# EAGLE board Daughter Card v6-shorter (EAGLE 7.7.0)
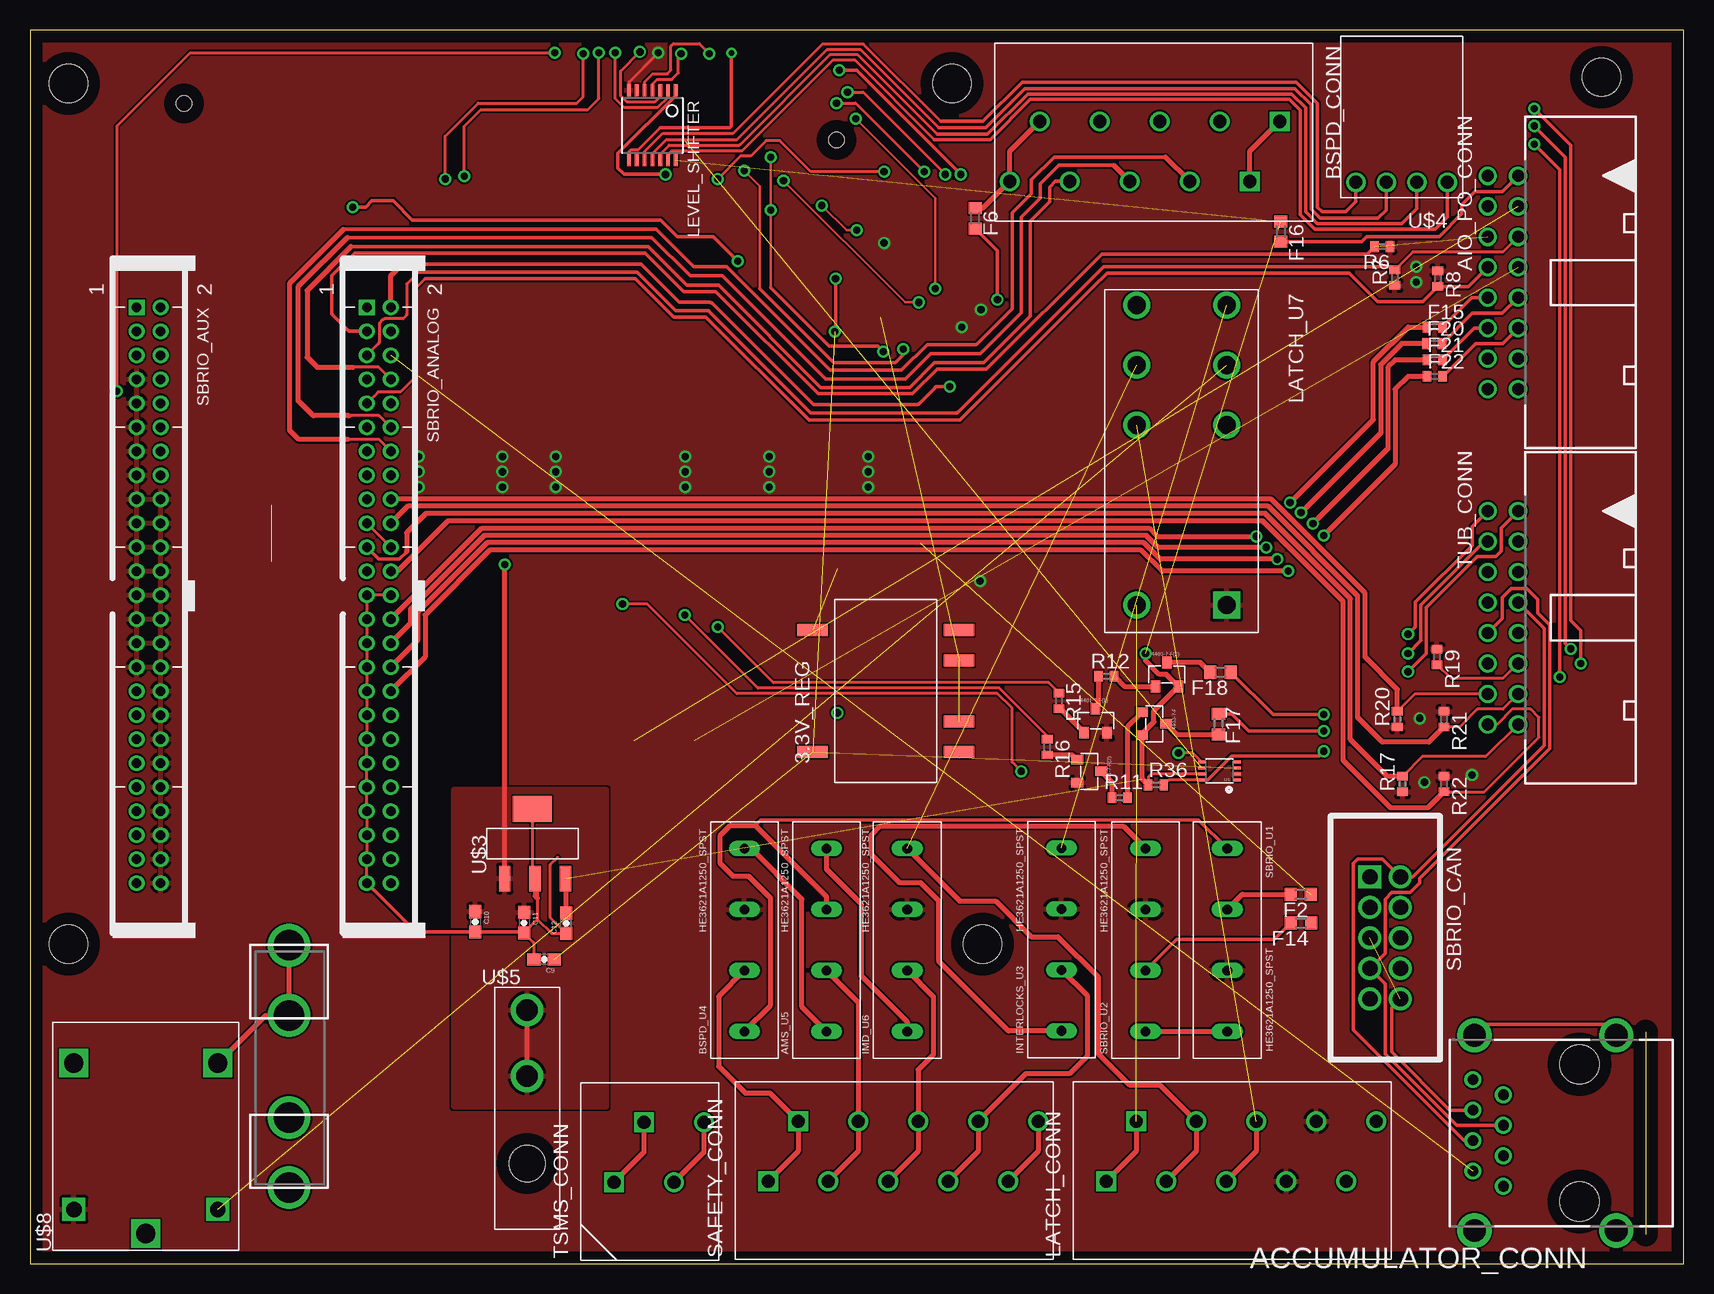
[diagram p0: board, top side]
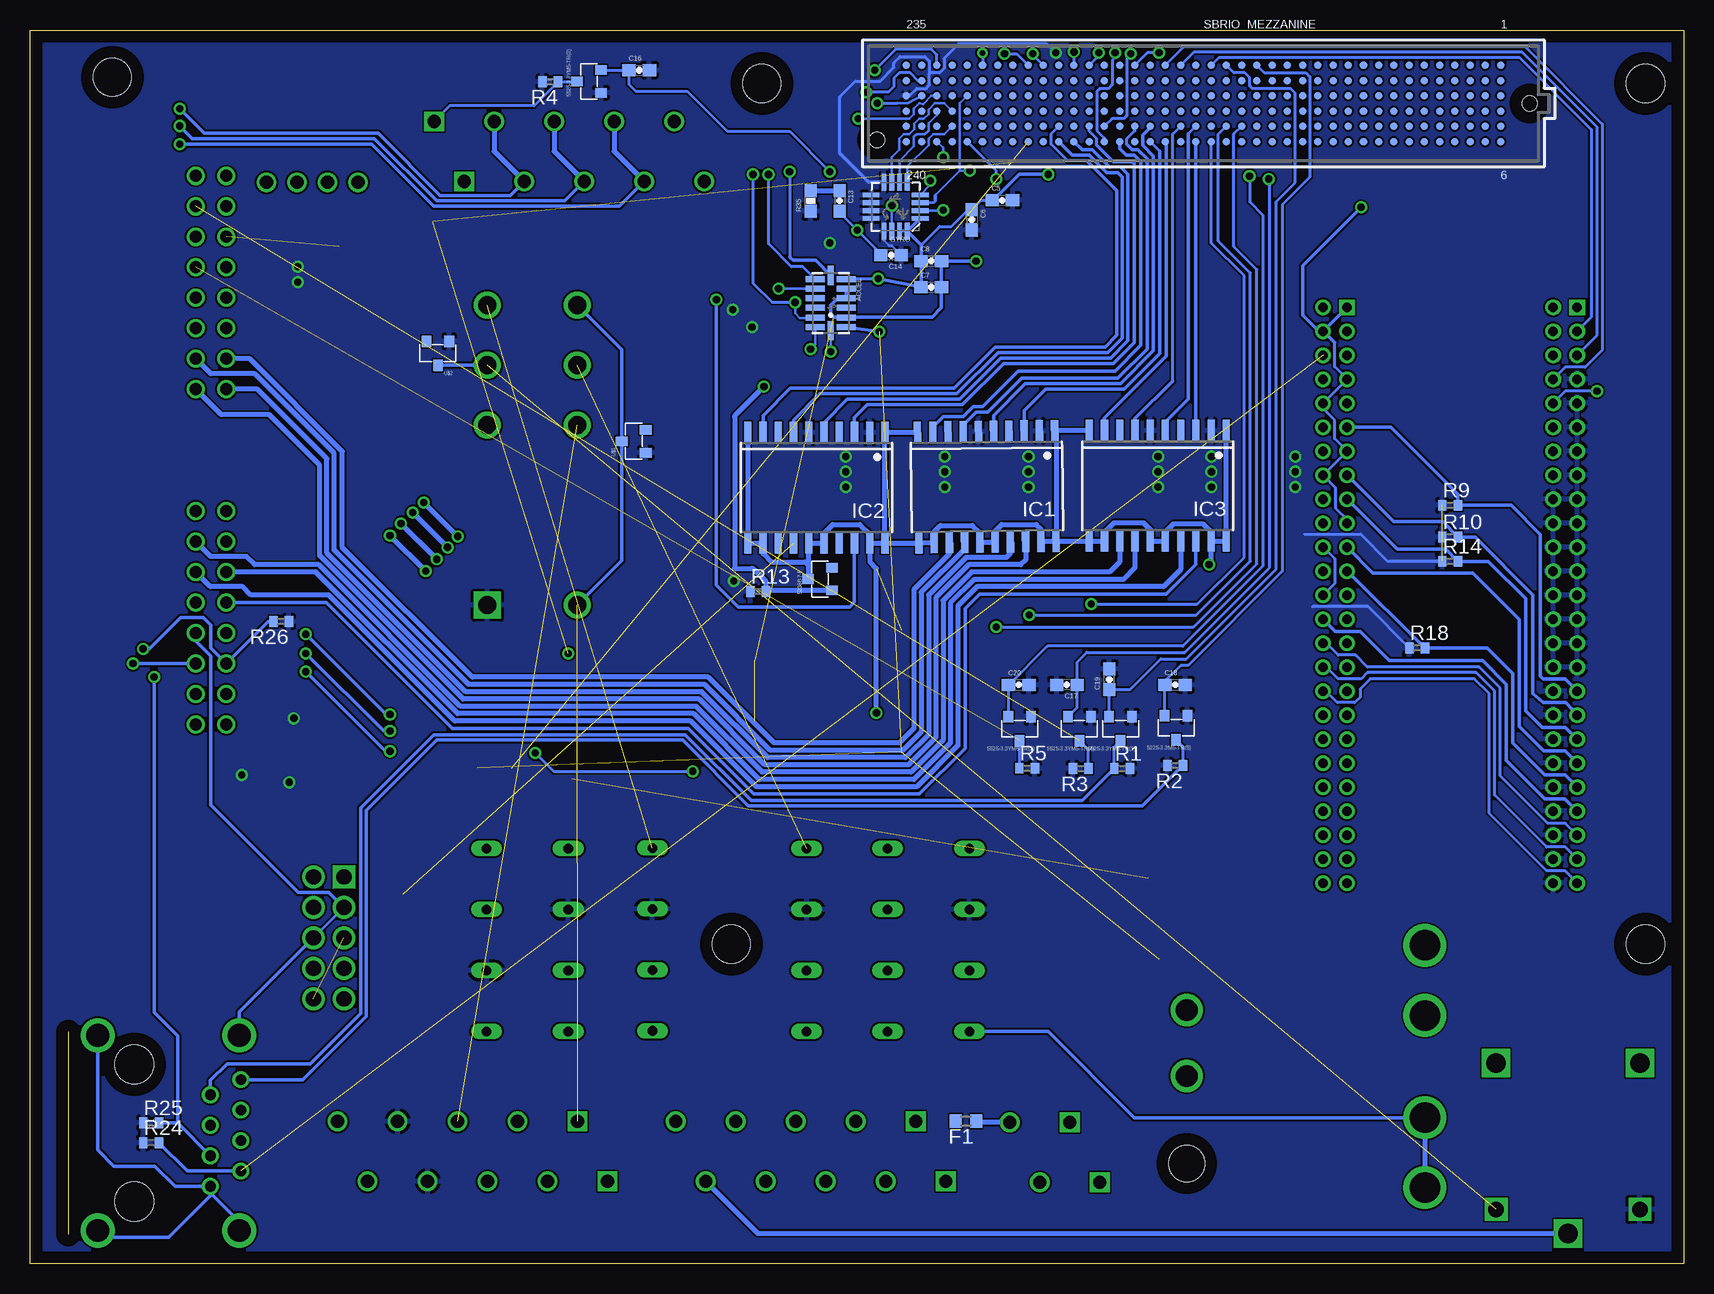
[diagram p1: board, bottom side, seen from below]

Size 137.82 x 102.87 mm. Coordinates in mm from the lower left corner, seen from the top.
Outline: 0,0 137.82,0 137.82,102.87 0,102.87 0,0
Copper layers (1*16): Top 0.035mm / dielectric 1.5mm / Bottom 0.035mm
Design rules "default *": minimum track width 8mil, minimum drill 13mil, track to track 6mil, track to pad 6mil, pad to pad 6mil, via to via 6mil, smd to smd 6mil, copper to edge 40mil, drill to drill 8mil, minimum pad ring 10mil, minimum via ring 8mil, stop-mask expansion 4mil, vias tented up to drill 0mil, thermal gap 10mil
Holes 3.17 mm at 3.2,98.4 76.83,98.4 130.96,98.93 79.38,26.67 3.2,26.67

## Footprints (pad centres in the part's own frame; a part is rotated, then mirrored left to right if it is on the bottom)
V78XX-1000 = smd 1 x 2.54: 1 -5.08,-6.096; 5 5.08,-6.096; 6 5.08,6.096; 7 2.54,6.096; 9 -2.54,6.096; 10 -5.08,6.096
SOT-23-3 = smd 0.8 x 0.976: P$1 0,1; P$2 -0.95,-1; P$3 0.95,-1
LGA14 = smd 0.5 x 1.6: 1 2,1.3; 2 1.2,1.3; 3 0.4,1.3; 4 -0.4,1.3; 5 -1.2,1.3; 6 -2,1.3; 8 -2,-1.3; 9 -1.2,-1.3; 10 -0.4,-1.3; 11 0.4,-1.3; 12 1.2,-1.3; 13 2,-1.3 | smd 1.6 x 0.5: 7 -2.3,0; 14 2.3,0
RJ45-SHIELD1 = drill 0.9 pad 1.4: 1 -4.445,6.35; 2 -3.175,8.89; 3 -1.905,6.35; 4 -0.635,8.89; 5 0.635,6.35; 6 1.905,8.89; 7 3.175,6.35; 8 4.445,8.89 | drill 1.9 pad 2.5: S1 -8.128,-3.048; S2 8.128,-3.048; S3 -8.128,8.76; S4 8.128,8.76 | hole 3.251: -5.715,0; 5.715,0
PAK100/2500-5-16 = drill 1 pad 1.422: 1 -8.89,-1.27; 2 -8.89,1.27; 3 -6.35,-1.27; 4 -6.35,1.27; 5 -3.81,-1.27; 6 -3.81,1.27; 7 -1.27,-1.27; 8 -1.27,1.27; 9 1.27,-1.27; 10 1.27,1.27; 11 3.81,-1.27; 12 3.81,1.27; 13 6.35,-1.27; 14 6.35,1.27; 15 8.89,-1.27; 16 8.89,1.27
HE3621A1250_SPST = drill 0.8 long: C+ -2.54,0; C- 2.54,0; S1 -7.62,0; S2 7.62,0
CONNECTOR_5 = drill 1.1 square: 1 0,0; 2 2.5,5 | drill 1.1: 3 5,0; 4 7.5,5; 5 10,0; 6 12.5,5; 7 15,0; 8 17.5,5; 9 20,0; 10 22.5,5
0603-CAP = smd 1.1 x 1: 1 -0.85,0; 2 0.85,0
R0603 = smd 1 x 1.1: 1 -0.85,0; 2 0.85,0
FUSE_5MM = drill 2.54 pad 3.556: 1 0,-10.1; 2 0,-4.258; 3 0,4.258; 4 0,10.1
R0402 = smd 0.7 x 0.9: 1 -0.65,0; 2 0.65,0
LGA16-4X4 = smd 1.4 x 0.4: 1 -2.05,0.975; 2 -2.05,0.325; 3 -2.05,-0.325; 4 -2.05,-0.975; 9 2.05,-0.975; 10 2.05,-0.325; 11 2.05,0.325; 12 2.05,0.975 | smd 0.4 x 1.4: 5 -0.975,-2.05; 6 -0.325,-2.05; 7 0.325,-2.05; 8 0.975,-2.05; 13 0.975,2.05; 14 0.325,2.05; 15 -0.325,2.05; 16 -0.975,2.05
PG-DSO-20 = smd 0.6 x 1.8: 1 -5.715,-4.6; 2 -4.445,-4.6; 3 -3.175,-4.6; 4 -1.905,-4.6; 5 -0.635,-4.6; 6 0.635,-4.6; 7 1.905,-4.6; 8 3.175,-4.6; 9 4.445,-4.6; 10 5.715,-4.6; 11 5.715,4.6; 12 4.445,4.6; 13 3.175,4.6; 14 1.905,4.6; 15 0.635,4.6; 16 -0.635,4.6; 17 -1.905,4.6; 18 -3.175,4.6; 19 -4.445,4.6; 20 -5.715,4.6
DPDT_JW2_FORM_C = drill 1.5: CENTER_1 -8,3.75; CENTER_2 -8,-3.75; COIL_2 12,-3.75; NC_1 -3,3.75; NC_2 -3,-3.75; NO_1 -13,3.75; NO_2 -13,-3.75 | drill 1.5 square: COIL_1 12,3.75
TSSOP14 = smd 0.305 x 0.991: 1 -1.95,-2.918; 2 -1.3,-2.918; 3 -0.65,-2.918; 4 0,-2.918; 5 0.65,-2.918; 6 1.3,-2.918; 7 1.95,-2.918; 8 1.95,2.918; 9 1.3,2.918; 10 0.65,2.918; 11 0,2.918; 12 -0.65,2.918; 13 -1.3,2.918; 14 -1.95,2.918
0603-RES = smd 1.1 x 1: 1 -0.85,0; 2 0.85,0
SBRIO_J502_J503 = drill 0.8 square: P$1 0,0 | drill 0.8: P$2 0,2; P$3 2,0; P$4 2,2; P$5 4,0; P$6 4,2; P$7 6,0; P$8 6,2; P$9 8,0; P$10 8,2; P$11 10,0; P$12 10,2; P$13 12,0; P$14 12,2; P$15 14,0; P$16 14,2; P$17 16,0; P$18 16,2; P$19 18,0; P$20 18,2; P$21 20,0; P$22 20,2; P$23 22,0; P$24 22,2; P$25 24,0; P$26 24,2; P$27 26,0; P$28 26,2; P$29 28,0; P$30 28,2; P$31 30,0; P$32 30,2; P$33 32,0; P$34 32,2; P$35 34,0; P$36 34,2; P$37 36,0; P$38 36,2; P$39 38,0; P$40 38,2; P$41 40,0; P$42 40,2; P$43 42,0; P$44 42,2; P$45 44,0; P$46 44,2; P$47 46,0; P$48 46,2; P$49 48,0; P$50 48,2
SBRIO_W = drill 1.27 pad 1.778 square: P$1 -5.08,-1.27 | drill 1.27 pad 1.778: P$2 -5.08,1.27; P$3 -2.54,-1.27; P$4 -2.54,1.27; P$5 0,-1.27; P$6 0,1.27; P$7 2.54,-1.27; P$8 2.54,1.27; P$9 5.08,-1.27; P$10 5.08,1.27
SEAM-40-XX.X-XX-06-X-A = smd 0.635 x 0.635: 1 24.765,3.175; 2 24.765,1.905; 3 24.765,0.635; 4 24.765,-0.635; 5 24.765,-1.905; 6 24.765,-3.175; 7 23.495,3.175; 8 23.495,1.905; 9 23.495,0.635; 10 23.495,-0.635; 11 23.495,-1.905; 12 23.495,-3.175; 13 22.225,3.175; 14 22.225,1.905; 15 22.225,0.635; 16 22.225,-0.635; 17 22.225,-1.905; 18 22.225,-3.175; 19 20.955,3.175; 20 20.955,1.905; 21 20.955,0.635; 22 20.955,-0.635; 23 20.955,-1.905; 24 20.955,-3.175; 25 19.685,3.175; 26 19.685,1.905; 27 19.685,0.635; 28 19.685,-0.635; 29 19.685,-1.905; 30 19.685,-3.175; 31 18.415,3.175; 32 18.415,1.905; 33 18.415,0.635; 34 18.415,-0.635; 35 18.415,-1.905; 36 18.415,-3.175; 37 17.145,3.175; 38 17.145,1.905; 39 17.145,0.635; 40 17.145,-0.635; 41 17.145,-1.905; 42 17.145,-3.175; 43 15.875,3.175; 44 15.875,1.905; 45 15.875,0.635; 46 15.875,-0.635; 47 15.875,-1.905; 48 15.875,-3.175; 49 14.605,3.175; 50 14.605,1.905; 51 14.605,0.635; 52 14.605,-0.635; 53 14.605,-1.905; 54 14.605,-3.175; 55 13.335,3.175; 56 13.335,1.905; 57 13.335,0.635; 58 13.335,-0.635; 59 13.335,-1.905; 60 13.335,-3.175; 61 12.065,3.175; 62 12.065,1.905; 63 12.065,0.635; 64 12.065,-0.635; 65 12.065,-1.905; 66 12.065,-3.175; 67 10.795,3.175; 68 10.795,1.905; 69 10.795,0.635; 70 10.795,-0.635; 71 10.795,-1.905; 72 10.795,-3.175; 73 9.525,3.175; 74 9.525,1.905; 75 9.525,0.635; 76 9.525,-0.635; 77 9.525,-1.905; 78 9.525,-3.175; 79 8.255,3.175; 80 8.255,1.905; 81 8.255,0.635; 82 8.255,-0.635; 83 8.255,-1.905; 84 8.255,-3.175; 85 6.985,3.175; 86 6.985,1.905; 87 6.985,0.635; 88 6.985,-0.635; 89 6.985,-1.905; 90 6.985,-3.175; 91 5.715,3.175; 92 5.715,1.905; 93 5.715,0.635; 94 5.715,-0.635; 95 5.715,-1.905; 96 5.715,-3.175; 97 4.445,3.175; 98 4.445,1.905; 99 4.445,0.635; 100 4.445,-0.635; 101 4.445,-1.905; 102 4.445,-3.175; 103 3.175,3.175; 104 3.175,1.905; 105 3.175,0.635; 106 3.175,-0.635; 107 3.175,-1.905; 108 3.175,-3.175; 109 1.905,3.175; 110 1.905,1.905; 111 1.905,0.635; 112 1.905,-0.635; 113 1.905,-1.905; 114 1.905,-3.175; 115 0.635,3.175; 116 0.635,1.905; 117 0.635,0.635; 118 0.635,-0.635; 119 0.635,-1.905; 120 0.635,-3.175; 121 -0.635,3.175; 122 -0.635,1.905; 123 -0.635,0.635; 124 -0.635,-0.635; 125 -0.635,-1.905; 126 -0.635,-3.175; 127 -1.905,3.175; 128 -1.905,1.905; 129 -1.905,0.635; 130 -1.905,-0.635; 131 -1.905,-1.905; 132 -1.905,-3.175; 133 -3.175,3.175; 134 -3.175,1.905; 135 -3.175,0.635; 136 -3.175,-0.635; 137 -3.175,-1.905; 138 -3.175,-3.175; 139 -4.445,3.175; 140 -4.445,1.905; 141 -4.445,0.635; 142 -4.445,-0.635; 143 -4.445,-1.905; 144 -4.445,-3.175; 145 -5.715,3.175; 146 -5.715,1.905; 147 -5.715,0.635; 148 -5.715,-0.635; 149 -5.715,-1.905; 150 -5.715,-3.175; 151 -6.985,3.175; 152 -6.985,1.905; 153 -6.985,0.635; 154 -6.985,-0.635; 155 -6.985,-1.905; 156 -6.985,-3.175; 157 -8.255,3.175; 158 -8.255,1.905; 159 -8.255,0.635; 160 -8.255,-0.635; 161 -8.255,-1.905; 162 -8.255,-3.175; 163 -9.525,3.175; 164 -9.525,1.905; 165 -9.525,0.635; 166 -9.525,-0.635; 167 -9.525,-1.905; 168 -9.525,-3.175; 169 -10.795,3.175; 170 -10.795,1.905; 171 -10.795,0.635; 172 -10.795,-0.635; 173 -10.795,-1.905; 174 -10.795,-3.175; 175 -12.065,3.175; 176 -12.065,1.905; 177 -12.065,0.635; 178 -12.065,-0.635; 179 -12.065,-1.905; 180 -12.065,-3.175; 181 -13.335,3.175; 182 -13.335,1.905; 183 -13.335,0.635; 184 -13.335,-0.635; 185 -13.335,-1.905; 186 -13.335,-3.175; 187 -14.605,3.175; 188 -14.605,1.905; 189 -14.605,0.635; 190 -14.605,-0.635; 191 -14.605,-1.905; 192 -14.605,-3.175; 193 -15.875,3.175; 194 -15.875,1.905; 195 -15.875,0.635; 196 -15.875,-0.635; 197 -15.875,-1.905; 198 -15.875,-3.175; 199 -17.145,3.175; 200 -17.145,1.905; 201 -17.145,0.635; 202 -17.145,-0.635; 203 -17.145,-1.905; 204 -17.145,-3.175; 205 -18.415,3.175; 206 -18.415,1.905; 207 -18.415,0.635; 208 -18.415,-0.635; 209 -18.415,-1.905; 210 -18.415,-3.175; 211 -19.685,3.175; 212 -19.685,1.905; 213 -19.685,0.635; 214 -19.685,-0.635; 215 -19.685,-1.905; 216 -19.685,-3.175; 217 -20.955,3.175; 218 -20.955,1.905; 219 -20.955,0.635; 220 -20.955,-0.635; 221 -20.955,-1.905; 222 -20.955,-3.175; 223 -22.225,3.175; 224 -22.225,1.905; 225 -22.225,0.635; 226 -22.225,-0.635; 227 -22.225,-1.905; 228 -22.225,-3.175; 229 -23.495,3.175; 230 -23.495,1.905; 231 -23.495,0.635; 232 -23.495,-0.635; 233 -23.495,-1.905; 234 -23.495,-3.175; 235 -24.765,3.175; 236 -24.765,1.905; 237 -24.765,0.635; 238 -24.765,-0.635; 239 -24.765,-1.905; 240 -24.765,-3.175 | hole 1.27: 27.191,0; -27.191,-3.048
CONNECTOR_2 = drill 1.1 square: 1 0,0; 2 2.5,5 | drill 1.1: 3 5,0; 4 7.5,5
VFSOP-8 = smd 0.25 x 0.65: P$1 -0.75,-1.45; P$2 -0.25,-1.45; P$3 0.25,-1.45; P$4 0.75,-1.45; P$5 0.75,1.45; P$6 0.25,1.45; P$7 -0.25,1.45; P$8 -0.75,1.45
SOT223-4 = smd 0.95 x 2.15: 1 -2.3,-2.9; 2 0.24,-2.9; 3 2.78,-2.9 | smd 3.25 x 2.15: 4 0,2.9
MOLEX_70553-0038 = drill 1.09: 1 -3.81,0; 2 -1.27,0; 3 1.27,0; 4 3.81,0
MOLEX_39-30-1020 = drill 1.8: 1 0,0; 2 0,5.5 | hole 3: 0,-7.3
RELAY = drill 1.6 square: A 14.199,-5.994; B 14.199,5.994; CENTER 0,0 | drill 1.27 square: V1 2.007,5.994; V2 2.007,-5.994

## Placement (x,y rotation side)
3.3V_REG  V7803-1000  [V78XX-1000]  71.32,47.75 270 top
4401-7-F(1)  MMBT4401-7-F  [SOT-23-3]  88.8,45.29 0 top
4401-7-F(2)  MMBT4401-7-F  [SOT-23-3]  88.27,41.07 270 top
4403-7-F  MMBT4403-7-F  [SOT-23-3]  93.68,45.03 270 top
4403-7-F(2)  MMBT4403-7-F  [SOT-23-3]  94.74,49.15 0 top
5225-3.3M5-TR(5)  MIC5225-3.3YM5-TR  [SOT-23-3]  42.32,44.7 180 bottom
5238B-7-F  MMBZ5238B-7-F  [SOT-23-3]  71.98,57.1 90 bottom
5525-3.3YM5-TR(1)  MIC5225-3.3YM5-TR  [SOT-23-3]  46.94,44.63 180 bottom
5525-3.3YM5-TR(2)  MIC5225-3.3YM5-TR  [SOT-23-3]  55.35,44.63 180 bottom
5525-3.3YM5-TR(3)  MIC5225-3.3YM5-TR  [SOT-23-3]  91.24,98.58 90 bottom
5525-3.3YM5-TR(4)  MIC5225-3.3YM5-TR  [SOT-23-3]  50.37,44.63 180 bottom
ACCEL  ADXL345  [LGA14]  71.09,80.11 270 bottom
ACCUMULATOR_CONN  RJ45-6L21-S  [RJ45-SHIELD1]  129.13,10.92 90 top
AIO_PO_CONN  2516-5  [PAK100/2500-5-16]  122.73,81.81 270 top
AMS_U5  HE3621A1250_SPST  [HE3621A1250_SPST]  66.37,27 90 top
BSPD_CONN  CONN_5  [CONNECTOR_5]  104.14,95.25 180 top
BSPD_U4  HE3621A1250_SPST  [HE3621A1250_SPST]  59.54,27 90 top
C5  .1uF  [0603-CAP]  56.79,88.67 0 bottom
C6  10uF  [0603-CAP]  59.33,87.05 270 bottom
C7  .1uF  [0603-CAP]  62.71,81.43 0 bottom
C8  1uF  [0603-CAP]  62.71,83.62 0 bottom
C9  22uF  [0603-CAP]  42.85,25.4 180 top
C10  10uF  [0603-CAP]  37.11,28.52 270 top
C11  10uF  [0603-CAP]  41.17,28.45 270 top
C12  22uF  [0603-CAP]  44.68,28.4 90 top
C13  470nF  [0603-CAP]  70.36,88.62 270 bottom
C14  10nF  [0603-CAP]  66.07,84.1 180 bottom
C16  1uF  [0603-CAP]  87.05,99.52 0 bottom
C17  1uF  [0603-CAP]  51.41,48.29 180 bottom
C18  1uF  [0603-CAP]  42.39,48.29 0 bottom
C19  1uF  [0603-CAP]  47.88,48.74 90 bottom
C20  1uF  [0603-CAP]  55.42,48.29 0 bottom
F1  250mA  [R0603]  59.82,11.91 180 bottom
F2  250mA  [R0603]  105.89,30.81 180 top
F3  FUSEX20MM  [FUSE_5MM]  21.59,16.46 180 top
F6  250mA  [R0603]  78.77,87.17 270 top
F14  250mA  [R0603]  105.92,28.42 180 top
F15  10mA PTC  [R0402]  117.04,78.11 0 top
F16  0.5A PTC  [R0603]  104.24,86.06 270 top
F17  1A PTC  [R0603]  99.03,44.98 270 top
F18  1A PTC  [R0603]  99.21,49.33 180 top
F20  10mA PTC  [R0402]  117.02,76.73 0 top
F21  10mA PTC  [R0402]  117.04,75.36 0 top
F22  10mA PTC  [R0402]  117.07,73.99 0 top
GYRO  L3G4200D  [LGA16-4X4]  65.68,88.14 180 bottom
IC1  BTS716G  [PG-DSO-20]  58.09,64.8 180.7 bottom
IC2  BTS716G  [PG-DSO-20]  72.29,64.72 180 bottom
IC3  BTS716G  [PG-DSO-20]  43.84,64.87 180 bottom
IMD_U6  HE3621A1250_SPST  [HE3621A1250_SPST]  73.1,27 90 top
INTERLOCKS_U3  HE3621A1250_SPST  [HE3621A1250_SPST]  85.95,27.05 90 top
LATCH_CONN  CONN_5  [CONNECTOR_5]  89.69,6.88 0 top
LATCH_U7  JW2SN-DC12V  [DPDT_JW2_FORM_C]  95.96,66.93 270 top
LEVEL_SHIFTER  [TSSOP14]  51.87,94.92 180 top
R1  10k  [R0402]  46.81,41.3 0 bottom
R2  10k  [R0402]  42.39,41.55 180 bottom
R3  10k  [R0402]  50.27,41.3 180 bottom
R4  10k  [R0402]  94.46,98.55 180 bottom
R5  10k  [R0402]  54.74,41.33 0 bottom
R6  10k  [R0402]  112.7,84.81 180 top
R7  10k  [R0402]  113.74,82.22 90 top
R8  10k  [R0402]  117.32,82.14 270 top
R9  10k  [R0402]  19.48,63.25 0 bottom
R10  10k  [R0402]  19.48,60.6 0 bottom
R11  4.7k  [R0402]  90.81,38.86 0 top
R12  4.7k  [R0402]  89.69,49 0 top
R13  10k  [R0402]  77.14,56.06 0 bottom
R14  10k  [R0402]  19.48,58.57 0 bottom
R15  4.7k  [R0402]  85.75,46.94 270 top
R16  4.7k  [R0402]  84.76,43.08 270 top
R17  10k  [R0402]  114.38,40.01 90 top
R18  10k  [R0402]  22.23,51.36 0 bottom
R19  10k  [R0402]  117.25,50.6 270 top
R20  10k  [R0402]  113.94,45.42 90 top
R21  10k  [R0402]  117.83,45.42 270 top
R22  10k  [R0402]  117.83,40.01 270 top
R24  10k  [R0402]  127.74,10.11 0 bottom
R25  10k  [R0402]  127.74,11.76 0 bottom
R26  10k  [R0402]  116.89,53.57 180 bottom
R35  10K  [0603-RES]  72.77,88.62 90 bottom
R36  4.7k  [R0402]  93.83,39.93 0 top
SAFETY_CONN  CONN_5  [CONNECTOR_5]  61.52,6.88 0 top
SBRIO_ANALOG  SBRIO_MIO  [SBRIO_J502_J503]  28.07,79.76 270 top
SBRIO_AUX  SBRIO_AUX  [SBRIO_J502_J503]  8.89,79.76 270 top
SBRIO_CAN  SBRIO_W500  [SBRIO_W]  112.93,27.18 270 top
SBRIO_MEZZANINE  SBRIO_RMC  [SEAM-40-XX.X-XX-06-X-A]  40.03,96.75 0 bottom
SBRIO_U1  HE3621A1250_SPST  [HE3621A1250_SPST]  99.77,27 270 top
SBRIO_U2  HE3621A1250_SPST  [HE3621A1250_SPST]  92.96,27 90 top
TSMS_CONN  CONN_2  [CONNECTOR_2]  48.67,6.81 0 top
TUB_CONN  2516-5  [PAK100/2500-5-16]  122.73,53.87 270 top
U1  [VFSOP-8]  99.11,41.1 90 top
U$1  DIODE_MMBD4448  [SOT-23-3]  87.5,68.58 90 bottom
U$2  DIODE_MMBD4448  [SOT-23-3]  103.84,75.92 180 bottom
U$3  LM340MP-5.0  [SOT223-4]  41.86,35.03 0 top
U$4  70553-0038  [MOLEX_70553-0038]  114.3,90.17 180 top
U$5  39-30-1020  [MOLEX_39-30-1020]  41.43,15.67 0 top
U$8  RELAY  [RELAY]  9.65,2.54 90 top

## Library data of the parts
3.3V_REG 4401-7-F(1) 4401-7-F(2) 4403-7-F 4403-7-F(2) 5238B-7-F AMS_U5 BSPD_CONN BSPD_U4 IMD_U6 INTERLOCKS_U3 LATCH_CONN LATCH_U7 SAFETY_CONN SBRIO_ANALOG SBRIO_AUX SBRIO_CAN SBRIO_U1 SBRIO_U2 TSMS_CONN U$1 U$2 U$8 = formula electric
5225-3.3M5-TR(5) 5525-3.3YM5-TR(1) 5525-3.3YM5-TR(2) 5525-3.3YM5-TR(3) 5525-3.3YM5-TR(4) = formula electric; DIGIKEYPN: MCP1703T-3302E/CBCT-ND
ACCEL GYRO = SparkFun-Sensors
ACCUMULATOR_CONN = con-tycoelectronics; OC_FARNELL: unknown; OC_NEWARK: unknown
AIO_PO_CONN TUB_CONN = con-3m; MPN: D2516-5002-AR; OC_FARNELL: 9838376; OC_NEWARK: 12P7055
C5-C14 C16-C20 F3 R35 = SparkFun-Passives
F1 F2 F6 F14-F18 F20-F22 R1-R22 R24-R26 R36 = resistor
IC1-IC3 = infineon; OC_FARNELL: unknown; OC_NEWARK: unknown
LEVEL_SHIFTER = SparkFun-DigitalIC
SBRIO_MEZZANINE = SEAM-40-XX.X-XX-06-X-A
U1 = adafruit
U$3 = texas
U$4 U$5 = molex

## Nets
3.3V: 3.3V_REG.5 ACCEL.1 ACCEL.6 C5.1 C6.1 C7.1 C8.1 C9.1 GYRO.1 GYRO.15 GYRO.16 LEVEL_SHIFTER.1 U1.P$3
5V: 4403-7-F(2).P$3 4403-7-F.P$3 C12.2 F16.1 LEVEL_SHIFTER.14 R36.1 U1.P$7 U$3.3
5V_IO_1: F17.1 TUB_CONN.3
12V: 3.3V_REG.1 5238B-7-F.P$1 C10.1 C11.1 IC1.1 IC1.10 IC1.11 IC1.12 IC1.15 IC1.16 IC1.19 IC1.20 IC2.1 IC2.10 IC2.11 IC2.12 IC2.15 IC2.16 IC2.19 IC2.20 IC3.1 IC3.10 IC3.11 IC3.12 IC3.15 IC3.16 IC3.19 IC3.20 U$3.1 U$5.1 U$5.2
ACCUMULATOR_FANS: AIO_PO_CONN.16 IC1.18
AI1: ACCUMULATOR_CONN.2 R24.2 SBRIO_ANALOG.P$6
AI2: ACCUMULATOR_CONN.3 BSPD_CONN.7 BSPD_CONN.8 R25.2 SBRIO_ANALOG.P$8
AI7: R22.2 SBRIO_ANALOG.P$24 TUB_CONN.15
AI8: AIO_PO_CONN.5 R6.2 SBRIO_ANALOG.P$3
AI9: AIO_PO_CONN.6 R7.2 SBRIO_ANALOG.P$5
AI10: AIO_PO_CONN.7 R8.2 SBRIO_ANALOG.P$9
AI11: R9.2 SBRIO_ANALOG.P$11 SBRIO_AUX.P$33
AI12: R10.2 SBRIO_ANALOG.P$15 SBRIO_AUX.P$35
AI13: R14.2 SBRIO_ANALOG.P$17 SBRIO_AUX.P$37
AI15: R18.2 SBRIO_ANALOG.P$23 SBRIO_AUX.P$41
AMS_OK-: AMS_U5.C+ SAFETY_CONN.3 SAFETY_CONN.4
AMS_OK_IN: 5525-3.3YM5-TR(1).P$1 ACCUMULATOR_CONN.7 R1.1
AMS_OUT: IC3.17 TUB_CONN.6
AO0: F15.1 SBRIO_ANALOG.P$28 SBRIO_AUX.P$43
AO1: F20.1 SBRIO_ANALOG.P$30 SBRIO_AUX.P$45
AO2: F21.1 SBRIO_ANALOG.P$32 SBRIO_AUX.P$47
AO3: F22.1 SBRIO_ANALOG.P$34 SBRIO_AUX.P$49
BRAKE_PRESS_IN_1: BSPD_CONN.5 BSPD_CONN.6 R26.2 SBRIO_ANALOG.P$12 TUB_CONN.11
BRAKE_PRESS_IN_2: BSPD_CONN.3 BSPD_CONN.4 R19.2 SBRIO_ANALOG.P$14 TUB_CONN.12
BSPD_OK+: BSPD_U4.C+ SAFETY_CONN.1 SAFETY_CONN.2
BSPD_OK_IN: 5525-3.3YM5-TR(3).P$1 BSPD_CONN.1 BSPD_CONN.2 R4.1
BSPD_OUT: IC3.13 TUB_CONN.4
BUZZER_OUT: IC3.18 TUB_CONN.7
CAN_GND: ACCUMULATOR_CONN.1 ACCUMULATOR_CONN.S1 ACCUMULATOR_CONN.S2 ACCUMULATOR_CONN.S3 ACCUMULATOR_CONN.S4 SBRIO_CAN.P$3 SBRIO_CAN.P$6 TUB_CONN.10
CAN_H: ACCUMULATOR_CONN.5 SBRIO_CAN.P$7 TUB_CONN.9
CAN_L: ACCUMULATOR_CONN.4 SBRIO_CAN.P$2 TUB_CONN.8
DC_DC_DISABLE: F18.1 TUB_CONN.1
DIO0: ACCEL.14 GYRO.2 SBRIO_MEZZANINE.228
DIO1: 5525-3.3YM5-TR(3).P$3 C16.1 SBRIO_MEZZANINE.216
DIO2: SBRIO_MEZZANINE.210
DIO3: SBRIO_MEZZANINE.198
DIO4: SBRIO_MEZZANINE.192 U1.P$6
DIO5: IC2.7 SBRIO_MEZZANINE.180
DIO6: IC2.5 SBRIO_MEZZANINE.174
DIO7: 5525-3.3YM5-TR(2).P$3 C20.1 SBRIO_MEZZANINE.162
DIO8: IC1.9 SBRIO_MEZZANINE.156
DIO9: IC1.3 SBRIO_MEZZANINE.144
DIO10: IC3.9 SBRIO_MEZZANINE.138
DIO11: IC3.3 SBRIO_MEZZANINE.126
DIO12: SBRIO_MEZZANINE.120 U1.P$5
DIO13: SBRIO_MEZZANINE.108
DIO14: SBRIO_MEZZANINE.102
DIO15: SBRIO_MEZZANINE.90
DIO16: ACCEL.7 SBRIO_MEZZANINE.231
DIO17: ACCEL.9 SBRIO_MEZZANINE.225
DIO18: ACCEL.13 GYRO.3 SBRIO_MEZZANINE.213
DIO19: SBRIO_MEZZANINE.207
DIO20: SBRIO_MEZZANINE.195
DIO21: SBRIO_MEZZANINE.189
DIO22: SBRIO_MEZZANINE.177
DIO23: SBRIO_MEZZANINE.171
DIO24: SBRIO_MEZZANINE.159
DIO25: SBRIO_MEZZANINE.153
DIO26: SBRIO_MEZZANINE.141
DIO27: SBRIO_MEZZANINE.135
DIO28: SBRIO_MEZZANINE.123
DIO29: SBRIO_MEZZANINE.117
DIO30: SBRIO_MEZZANINE.105
DIO31: SBRIO_MEZZANINE.99
DIO32: GYRO.5 SBRIO_MEZZANINE.221
DIO33: SBRIO_MEZZANINE.215
DIO34: SBRIO_MEZZANINE.203
DIO35: SBRIO_MEZZANINE.197
DIO36: SBRIO_MEZZANINE.185
DIO37: IC2.9 SBRIO_MEZZANINE.179
DIO38: IC2.3 SBRIO_MEZZANINE.167
DIO39: 5525-3.3YM5-TR(4).P$3 C17.1 SBRIO_MEZZANINE.161
DIO40: IC1.7 SBRIO_MEZZANINE.149
DIO41: IC1.5 SBRIO_MEZZANINE.143
DIO42: IC3.7 SBRIO_MEZZANINE.131
DIO43: IC3.5 SBRIO_MEZZANINE.125
DIO44: R16.1 SBRIO_MEZZANINE.113
DIO45: R15.1 SBRIO_MEZZANINE.107
DIO48: ACCEL.8 SBRIO_MEZZANINE.230
DIO64: GYRO.6 SBRIO_MEZZANINE.226
DIO65: GYRO.7 SBRIO_MEZZANINE.220
DIO80: SBRIO_MEZZANINE.235
DIO81: ACCEL.12 GYRO.4 SBRIO_MEZZANINE.223
DIO82: SBRIO_MEZZANINE.217
DIO83: LEVEL_SHIFTER.8 SBRIO_MEZZANINE.205
DIO84: SBRIO_MEZZANINE.199
DIO85: LEVEL_SHIFTER.5 SBRIO_MEZZANINE.187
DIO86: LEVEL_SHIFTER.4 SBRIO_MEZZANINE.181
DIO87: LEVEL_SHIFTER.3 SBRIO_MEZZANINE.169
DIO88: LEVEL_SHIFTER.2 SBRIO_MEZZANINE.163
DIO89: SBRIO_AUX.P$12
DIO90: SBRIO_AUX.P$10 SBRIO_MEZZANINE.145
DIO91: SBRIO_AUX.P$8 SBRIO_MEZZANINE.133
DIO92: SBRIO_AUX.P$5 SBRIO_MEZZANINE.127
DIO93: SBRIO_AUX.P$3 SBRIO_MEZZANINE.115
DIO94: 5525-3.3YM5-TR(1).P$3 C19.1 SBRIO_MEZZANINE.109
DIO95: 5225-3.3M5-TR(5).P$3 C18.1 SBRIO_MEZZANINE.97
DIO_GND: 3.3V_REG.7 3.3V_REG.9 ACCEL.2 ACCEL.4 ACCEL.5 C7.2 C8.2 C9.2 C10.2 C11.2 C12.1 SBRIO_ANALOG.P$1 SBRIO_ANALOG.P$4 SBRIO_ANALOG.P$7 SBRIO_ANALOG.P$10 SBRIO_ANALOG.P$13 SBRIO_ANALOG.P$16 SBRIO_ANALOG.P$19 SBRIO_ANALOG.P$22 SBRIO_ANALOG.P$25 SBRIO_ANALOG.P$26 SBRIO_ANALOG.P$27 SBRIO_ANALOG.P$29 SBRIO_ANALOG.P$31 SBRIO_ANALOG.P$33 SBRIO_ANALOG.P$35 SBRIO_ANALOG.P$37 SBRIO_ANALOG.P$39 SBRIO_ANALOG.P$41 SBRIO_ANALOG.P$43 SBRIO_ANALOG.P$45 SBRIO_ANALOG.P$47 SBRIO_ANALOG.P$49 U$3.2 U$3.4
E-STOP_OK: 5525-3.3YM5-TR(4).P$1 AIO_PO_CONN.4 R3.1
GLV+: AMS_U5.C- BSPD_U4.S1 F3.3 F3.4 SBRIO_U1.S1
GND: 4401-7-F(1).P$3 4401-7-F(2).P$3 5225-3.3M5-TR(5).P$2 5525-3.3YM5-TR(1).P$2 5525-3.3YM5-TR(2).P$2 5525-3.3YM5-TR(3).P$2 5525-3.3YM5-TR(4).P$2 BSPD_U4.C- C5.2 C6.2 C14.1 C16.2 C17.2 C18.2 C19.2 C20.2 GYRO.8 GYRO.9 GYRO.10 GYRO.11 GYRO.12 GYRO.13 IC1.2 IC1.6 IC2.2 IC2.6 IC3.2 IC3.6 IMD_U6.C- INTERLOCKS_U3.C- LATCH_CONN.7 LATCH_CONN.8 LATCH_U7.COIL_1 LEVEL_SHIFTER.7 R1.2 R2.2 R3.2 R4.2 R5.2 R6.1 R7.1 R8.1 R9.1 R10.1 R13.1 R14.1 R17.1 R18.1 R19.1 R20.1 R21.1 R22.1 R24.1 R25.1 R26.1 R35.1 SBRIO_AUX.P$7 SBRIO_AUX.P$9 SBRIO_AUX.P$11 SBRIO_AUX.P$13 SBRIO_AUX.P$15 SBRIO_AUX.P$17 SBRIO_AUX.P$18 SBRIO_AUX.P$19 SBRIO_AUX.P$20 SBRIO_AUX.P$21 SBRIO_AUX.P$22 SBRIO_AUX.P$23 SBRIO_AUX.P$24 SBRIO_AUX.P$25 SBRIO_AUX.P$26 SBRIO_AUX.P$27 SBRIO_AUX.P$28 SBRIO_AUX.P$29 SBRIO_AUX.P$30 SBRIO_AUX.P$31 SBRIO_AUX.P$32 SBRIO_AUX.P$34 SBRIO_AUX.P$36 SBRIO_AUX.P$38 SBRIO_AUX.P$40 SBRIO_AUX.P$42 SBRIO_AUX.P$44 SBRIO_AUX.P$46 SBRIO_AUX.P$48 SBRIO_AUX.P$50 SBRIO_MEZZANINE.237 SBRIO_U1.C- SBRIO_U2.C- U1.P$2 U$1.P$2 U$2.P$2 U$8.V1
IMD_OK+: IMD_U6.C+ SAFETY_CONN.5 SAFETY_CONN.6
IMD_OK_IN: 5225-3.3M5-TR(5).P$1 ACCUMULATOR_CONN.8 R2.1
IMD_OUT: IC3.14 TUB_CONN.5
INTER_OK+: INTERLOCKS_U3.C+ SAFETY_CONN.7 SAFETY_CONN.8
LAP_TIMER_IN: R36.2 TUB_CONN.2 U1.P$8
LATCH_LED+: LATCH_CONN.5 LATCH_CONN.6 LATCH_U7.NC_2
LATCH_OK: 5525-3.3YM5-TR(2).P$1 AIO_PO_CONN.8 R5.1
LATCH_SW_IN: LATCH_CONN.1 LATCH_CONN.2 LATCH_U7.COIL_2 LATCH_U7.NO_2 U$1.P$1
LATCH_SW_OUT: IMD_U6.S2 LATCH_CONN.3 LATCH_CONN.4 LATCH_U7.CENTER_2
N$2: SBRIO_U1.S2 SBRIO_U2.S1
N$3: AIO_PO_CONN.9 F15.2
N$4: 5238B-7-F.P$2 R13.2 SBRIO_ANALOG.P$2
N$6: AIO_PO_CONN.10 F20.2
N$7: INTERLOCKS_U3.S1 SBRIO_U2.S2
N$8: AMS_U5.S1 BSPD_U4.S2
N$9: AIO_PO_CONN.11 F21.2
N$10: AIO_PO_CONN.12 F22.2
N$13: AMS_U5.S2 IMD_U6.S1
N$14: F3.1 F3.2 U$8.A
N$20: AIO_PO_CONN.2 F16.2
N$29: AIO_PO_CONN.3
N$37: C13.2 C14.2 GYRO.14
N$38: C13.1 R35.2
N$41: BSPD_CONN.9 BSPD_CONN.10 F6.1
N$54: 4403-7-F.P$2 R11.2
N$56: 4403-7-F.P$1 F17.2
N$57: 4403-7-F(2).P$1 F18.2
N$58: 4403-7-F(2).P$2 R12.2
N$60: 4401-7-F(1).P$2 R15.2
N$61: 4401-7-F(1).P$1 R12.1
N$62: 4401-7-F(2).P$2 R16.2
N$63: 4401-7-F(2).P$1 R11.1
PO2: AIO_PO_CONN.15 IC1.17
PO3: AIO_PO_CONN.14 IC1.14
PO4: AIO_PO_CONN.13 IC1.13
PRECHARGE_DONE+: F1.1 TSMS_CONN.3 TSMS_CONN.4
SBRIO_OK+_1: F2.1 IC2.14
SBRIO_OK+_1_RELAY_IN: F2.2 SBRIO_U1.C+
SBRIO_OK+_2: F14.1
SBRIO_OK_2_RELAY: F14.2 SBRIO_U2.C+
SHIELD: ACCUMULATOR_CONN.6 SBRIO_CAN.P$5 SBRIO_CAN.P$10
SHUTDOWN_1: IC2.17
SHUTDOWN_3: IC2.13
SHUTDOWN_OK+: INTERLOCKS_U3.S2 LATCH_U7.NO_1
STEERING_POS: R17.2 SBRIO_ANALOG.P$21 SBRIO_AUX.P$39 TUB_CONN.16
THROTTLE_IN_1: R20.2 SBRIO_ANALOG.P$18 TUB_CONN.13
THROTTLE_IN_2: R21.2 SBRIO_ANALOG.P$20 TUB_CONN.14
THROTTLE_OK_OUT: F6.2 IC2.18
TSMS_IN+: TSMS_CONN.1 TSMS_CONN.2
TSMS_OUT+: SAFETY_CONN.9 SAFETY_CONN.10 U$8.CENTER
TSMS_OUT_CTRL+: LATCH_U7.CENTER_1 U$2.P$1 U$8.V2
VCC: SBRIO_MEZZANINE.236
WS1: LEVEL_SHIFTER.13 U$4.1
WS2: LEVEL_SHIFTER.12 U$4.2
WS3: LEVEL_SHIFTER.11 U$4.3
WS4: LEVEL_SHIFTER.10 U$4.4

## Tracks (layer width: path | path; a pad name or v marks a point on that pad's centre or on a via)
3.3V  (via drill 0.6)  (3 unrouted)
  Top 0.305: v67.06,77.72 arc90 67.13,77.8 v67.13,82.14 | LEVEL_SHIFTER.1 53.82,97.4 49,92.58 49,91.36 49.53,90.83 v52.96,90.83
  Bottom 0.254: GYRO.16 GYRO.15 | 63.56,84.94 62.02,86.49 61.04,86.49 59.63,87.9 C6.1 58.56,88.67 C5.1
  Bottom 0.305: GYRO.1 GYRO.16 63.56,84.94 C8.1 C7.1 v67.13,82.14 ACCEL.6 | ACCEL.1 v67.06,77.72 | v52.96,90.83 55.4,90.83 57.56,88.67 C5.1
5V  (via drill 0.6)  (3 unrouted)
  Top 0.254: U1.P$7 93.42,40.85 93.19,40.62 93.19,39.94 R36.1
  Top 0.406: U$3.3 44.64,29.29 C12.2 | R36.1 92.67,40.43 4403-7-F.P$3 92.67,44.21 93.65,45.19 93.65,46.11 4403-7-F(2).P$3 94.69,49.15 94.11,49.15 92.96,50.29 v92.96,50.9
5V_IO_1  (via drill 0.6)
  Top 0.305: TUB_CONN.3 121.18,60.22 115.9,54.94 115.9,51.97 v114.83,50.9 | F17.1 100.17,45.83 101.58,44.42 v107.82,44.42
  Bottom 0.305: v107.82,44.42 108.36,44.42 v114.83,50.9
12V  (via drill 0.6)  (1 unrouted)
  Top 0.406: U$5.1 U$5.2 | U$3.1 v39.56,58.3
  Bottom 0.254: 67.82,60.81 67.84,60.78 IC2.19
  Bottom 0.406: IC2.10 IC2.11 IC2.12 76.73,59.21 76.05,58.52 73.23,58.52 72.92,58.22 | IC2.20 IC2.19 67.82,60.09 67.82,58.52 67.28,57.99 v67.28,45.95 | IC3.19 IC3.20 IC3.1 | IC3.10 52.43,69.47 IC1.1 52.32,69.47 IC1.20 | IC1.10 IC2.1 IC2.20 | IC2.20 63.75,60.12 IC1.11 62.48,60.13 IC1.12 62.48,61.04 61.95,61.57 59.28,61.57 58.67,60.96 IC1.15 57.41,60.19 IC1.16 57.4,61.09 56.84,61.65 53.95,61.65 53.57,61.27 53.57,60.27 IC1.19 52.34,60.25 IC1.20 | IC1.20 IC3.11 IC3.12 48.28,60.98 47.47,61.8 45.03,61.8 44.42,61.19 44.42,60.32 IC3.15 IC3.16 43.2,61.04 42.52,61.72 40.08,61.72 39.4,61.04 IC3.19 | 67.82,60.81 68.66,61.65 70.94,61.65 71.65,60.94 IC2.16 IC2.15 72.92,58.22 | 5238B-7-F.P$1 72.92,57.16 72.92,58.22 | v39.56,58.3 39.4,58.47 IC3.19
  pour Top: 41.83,39.55 35.28,39.55 35.28,13.11 48.08,13.11 48.08,35.51 48.08,39.55
ACCUMULATOR_FANS
  Bottom 0.406: IC1.18 54.86,58.68 55.24,58.29 59.59,58.29 62.33,55.55 62.33,43.89 64.62,41.6 76.58,41.6 82.07,47.09 101.73,47.09 113.69,59.05 113.69,66.6 117.88,70.79 121.87,70.79 AIO_PO_CONN.16
AI1  (1 unrouted)
  Bottom 0.305: ACCUMULATOR_CONN.2 124.72,7.75 R24.2
AI2  (via drill 0.6)
  Top 0.254: SBRIO_ANALOG.P$8 29.07,74.75 26.9,74.75
  Top 0.305: BSPD_CONN.8 85.45,90.25 84.96,89.76 84.96,88.54 83.36,86.94 83.36,79.02 79.48,75.13 75.36,75.13 73.3,73.08 65.91,73.08 57.38,81.61 54.71,81.61 51.51,84.81 26.75,84.81 | v127.48,48.92 127.48,91.21 v125.35,93.34
  Top 0.406: 26.75,84.81 23.09,81.15 23.09,75.59 23.93,74.75 26.9,74.75
  Bottom 0.305: ACCUMULATOR_CONN.3 125.53,11.76 | 125.53,11.76 R25.2 | 125.53,11.76 125.53,19 127.48,20.95 v127.48,48.92 | v125.35,93.34 109.35,93.34 104.17,88.16 88.73,88.16 BSPD_CONN.8
  Bottom 0.406: BSPD_CONN.7 89.14,92.75 BSPD_CONN.8
AI7
  Top 0.254: R22.2 121.19,39.35 125.73,43.89 125.73,45.57 125.04,46.25 123.52,46.25 122.25,44.98 TUB_CONN.15
  Top 0.406: R22.2 116.5,38.02 113.39,38.02 109.42,41.99 109.42,55.24 102.72,61.95 34.82,61.95 30.63,57.76 SBRIO_ANALOG.P$24
AI8  (1 unrouted)
  Top 0.305: SBRIO_ANALOG.P$3 26.56,77.76 25.15,79.17 25.15,82.37 27.05,84.28 51.28,84.28 54.48,81.08 57.15,81.08 65.68,72.54 73.53,72.54 75.59,74.6 79.7,74.6 89.31,84.2 111.44,84.2 R6.2
AI9
  Top 0.254: AIO_PO_CONN.6 122.73,84.35 115.22,84.35 R7.2 | 32.49,82.68 arc45 32.31,82.6 31.39,81.69 31.39,79.2 arc-45 31.32,79.02 31.09,78.79 29.59,78.79 arc45 29.41,78.72 29.11,78.41 29.11,76.9 arc-45 29.03,76.72 SBRIO_ANALOG.P$5
  Top 0.305: 32.49,82.68 50.49,82.68 arc-45 50.67,82.6 53.8,79.48 56.44,79.48 arc-45 56.62,79.4 65.08,70.94 77.16,70.94 arc45 77.34,71.02 89.46,83.13 113.48,83.13 R7.2
AI10
  Top 0.254: 32.92,82.14 32,81.23 32,73.84 30.86,72.69 29.01,72.69 SBRIO_ANALOG.P$9
  Top 0.305: AIO_PO_CONN.7 119.87,81.49 R8.2 116.07,80.24 112.32,80.24 109.96,82.6 89.76,82.6 89.23,82.07 89.08,81.92 77.5,70.33 64.92,70.33 56.31,78.94 53.65,78.94 50.44,82.14 32.92,82.14
AI11
  Bottom 0.305: SBRIO_AUX.P$33 9.9,48.77 11.73,48.77 11.96,49 11.96,60.81 14.4,63.25 R9.2 18.83,64.17 24.42,69.76 SBRIO_ANALOG.P$11
AI12
  Bottom 0.305: SBRIO_AUX.P$35 9.85,46.79 11.73,46.79 12.57,47.55 12.57,55.78 17.4,60.6 R10.2 20.1,61.87 24.18,61.87 SBRIO_ANALOG.P$15
AI13
  Bottom 0.305: SBRIO_AUX.P$37 9.86,44.73 11.81,44.73 13.18,46.1 13.18,55.47 16.28,58.57 R14.2 19.85,59.59 23.9,59.59 SBRIO_ANALOG.P$17
AI15
  Bottom 0.305: SBRIO_AUX.P$41 9.9,40.77 11.58,40.77 14.25,43.43 14.25,49.23 16.38,51.36 R18.2 SBRIO_ANALOG.P$23
AMS_OK-
  Top 0.406: SAFETY_CONN.3 69.02,9.38 69.02,11.35 SAFETY_CONN.4 69.02,21.81 AMS_U5.C+
AMS_OK_IN
  Bottom 0.254: R1.1 47.46,43.1 5525-3.3YM5-TR(1).P$1
  Bottom 0.305: ACCUMULATOR_CONN.7 122.78,15.29 121.39,16.69 114.45,16.69 110.26,20.88 110.26,38.02 104.17,44.12 83.21,44.12 77.72,38.63 50.13,38.63 R1.1
AMS_OUT
  Bottom 0.406: IC3.17 41.94,57.89 43.36,56.46 58.9,56.46 60.5,54.86 60.5,43.2 63.93,39.78 77.27,39.78 82.75,45.26 102.41,45.26 112.93,55.78 119.41,55.78 120.09,56.46 122.78,56.46 TUB_CONN.6
AO0  (via drill 0.6)
  Top 0.406: SBRIO_ANALOG.P$28 37.65,61.34 93.27,61.34 93.95,60.66 v102.18,60.66 | v105,63.48 111.94,70.41 111.94,75.21 114.83,78.11 F15.1
  Bottom 0.305: SBRIO_AUX.P$43 9.92,38.79 11.58,38.79 14.78,41.99 14.78,48.31 16.76,50.29 24.54,50.29 26.98,52.73 29.04,52.73 SBRIO_ANALOG.P$28
  Bottom 0.406: v102.18,60.66 v105,63.48
AO1  (via drill 0.6)
  Top 0.406: F20.1 114.3,76.73 112.55,74.98 112.55,69.27 v105.92,62.64 | v103.02,59.74 94.03,59.74 93.04,60.73 37.87,60.73 31.7,54.56 31.7,53.39 SBRIO_ANALOG.P$30
  Bottom 0.254: SBRIO_AUX.P$45 9.86,36.73 11.35,36.73 15.32,40.69 15.32,48.01 17.07,49.76 26.36,49.76 27.36,50.75 28.8,50.75 29.81,51.76 SBRIO_ANALOG.P$30
  Bottom 0.406: v105.92,62.64 v103.02,59.74
AO2  (via drill 0.6)
  Top 0.406: F21.1 113.77,75.36 113.16,74.75 113.16,67.97 v106.91,61.72 | v103.94,58.75 94.18,58.75 92.81,60.12 38.1,60.12 32.31,54.33 32.31,52 SBRIO_ANALOG.P$32
  Bottom 0.254: SBRIO_AUX.P$47 9.88,34.75 11.43,34.75 15.77,39.09 15.77,47.78 17.3,49.3 26.36,49.3 26.9,48.77 28.8,48.77 29.79,49.76 SBRIO_ANALOG.P$32
  Bottom 0.406: v106.91,61.72 v103.94,58.75
AO3  (via drill 0.6)
  Top 0.406: F22.1 114.83,73.99 113.77,72.92 113.77,66.67 v107.82,60.73 | v104.85,57.76 94.34,57.76 92.58,59.51 38.33,59.51 32.92,54.1 32.92,50.61 SBRIO_ANALOG.P$34
  Bottom 0.254: SBRIO_AUX.P$49 9.9,32.77 11.43,32.77 16.23,37.57 16.23,47.55 17.45,48.77 26.14,48.77 26.98,47.93 26.98,47.24 27.43,46.79 28.88,46.79 29.85,47.76 SBRIO_ANALOG.P$34
  Bottom 0.406: v107.82,60.73 v104.85,57.76
BRAKE_PRESS_IN_1  (via drill 0.6)
  Top 0.254: SBRIO_ANALOG.P$12 29.11,70.71 26.59,70.71
  Top 0.305: 90.3,91.59 85.72,91.59 84.2,90.07 84.2,88.85 82.6,87.25 82.6,79.32 79.17,75.89 75.06,75.89 72.92,73.76 66.29,73.76 57.68,82.37 55.02,82.37 51.82,85.57 26.44,85.57 | v128.4,51.28 127.94,51.74 127.94,92.28 v125.35,94.87
  Top 0.406: BSPD_CONN.6 90.3,91.59 | 26.44,85.57 22.33,81.46 22.33,72.01 23.62,70.71 26.59,70.71
  Bottom 0.305: v125.35,94.87 124.28,93.8 109.12,93.8 103.94,88.62 93.27,88.62 BSPD_CONN.6 | v128.4,51.28 127.86,51.28 125.27,53.87 123.37,53.87 122.76,53.26 122.76,51.36 TUB_CONN.11 117.96,53.57 R26.2
  Bottom 0.406: BSPD_CONN.5 94.14,92.75 BSPD_CONN.6
BRAKE_PRESS_IN_2  (via drill 0.6)
  Top 0.254: SBRIO_ANALOG.P$14 29.09,68.73 26.52,68.73 | R19.2 118.43,48.84 122.76,48.84 123.98,50.06 TUB_CONN.12
  Top 0.305: 94.61,92.28 85.34,92.28 83.44,90.37 83.44,89.23 81.84,87.63 81.84,79.63 78.87,76.66 74.75,76.66 72.62,74.52 66.67,74.52 58.06,83.13 55.32,83.13 52.2,86.26 26.14,86.26 | v125.35,96.32 128.4,93.27 128.4,53.65 129.24,52.81 v129.24,50.06
  Top 0.406: BSPD_CONN.4 94.61,92.28 | 26.14,86.26 21.64,81.76 21.64,69.49 22.4,68.73 26.52,68.73
  Bottom 0.305: BSPD_CONN.4 97.81,89.08 103.63,89.08 108.81,94.26 123.29,94.26 v125.35,96.32 | v129.24,50.06 TUB_CONN.12
  Bottom 0.406: BSPD_CONN.3 99.14,92.75 BSPD_CONN.4
BSPD_OK+
  Top 0.406: SAFETY_CONN.1 64.02,9.38 SAFETY_CONN.2 61.65,14.25 59.59,14.25 57.38,16.46 57.38,22.3 BSPD_U4.C+
BSPD_OK_IN
  Top 0.406: BSPD_CONN.2 101.64,92.75 BSPD_CONN.1
  Bottom 0.254: BSPD_CONN.1 102.84,96.55 95.82,96.55 R4.1 92.26,98.55 5525-3.3YM5-TR(3).P$1
BSPD_OUT
  Bottom 0.406: IC3.13 47.02,58.52 47.85,57.68 59.36,57.68 61.72,55.32 61.72,43.66 64.39,41 76.81,41 82.3,46.48 101.96,46.48 113.77,58.29 119.1,58.29 119.79,58.98 122.76,58.98 TUB_CONN.4
BUZZER_OUT
  Bottom 0.305: IC3.18 40.66,58.32 43.13,55.85 58.67,55.85 59.89,54.63 59.89,42.98 63.7,39.17 77.5,39.17 82.98,44.65 102.64,44.65 113.13,55.14 TUB_CONN.7
CAN_GND
  Top 0.305: ACCUMULATOR_CONN.S4 121.29,19.96 131.27,19.96 ACCUMULATOR_CONN.S2
  Bottom 0.254: SBRIO_CAN.P$3 SBRIO_CAN.P$6
  Bottom 0.305: 122.78,5.94 ACCUMULATOR_CONN.1 125.73,6.48 127.41,8.15 130.84,8.15 132.18,9.5 ACCUMULATOR_CONN.S2 | 122.78,5.94 122.78,5.69 126.26,2.21 131.6,2.21 ACCUMULATOR_CONN.S1 | ACCUMULATOR_CONN.S3 120.37,3.53 122.78,5.94 | ACCUMULATOR_CONN.S4 120.37,21 SBRIO_CAN.P$6 | SBRIO_CAN.P$3 112.92,30.98 115.48,30.98 122.76,38.25 122.76,50.67 124,51.92 TUB_CONN.10
CAN_H
  Top 0.305: ACCUMULATOR_CONN.5 118.9,11.56 112.93,17.53 112.93,23.37 SBRIO_CAN.P$7 112.93,25.91 112.93,30.4 113.5,30.98 115.04,30.98 115.82,31.76 115.82,32.16 126.64,42.98 126.64,53.26 125.65,54.25 125.65,55.4 124.74,56.31 123.44,56.31 122.68,55.55 122.68,53.82 TUB_CONN.9
CAN_L
  Top 0.305: ACCUMULATOR_CONN.4 119.48,10.29 110.26,19.51 110.26,33.38 110.64,33.76 112.7,33.76 SBRIO_CAN.P$2 115.24,32.26 126.19,43.2 126.19,52.96 TUB_CONN.8
DC_DC_DISABLE  (via drill 0.6)
  Top 0.305: F18.1 103.59,45.8 v107.82,45.8 | v114.83,52.5 115.44,53.11 115.44,55.17 120.17,59.89 120.17,61.47 TUB_CONN.1
  Bottom 0.305: v107.82,45.8 108.13,45.8 v114.83,52.5
DIO0  (via drill 0.6)
  Top 0.203: v61.72,92.28 v61.72,87.86 61.72,81.38
  Top 0.305: 61.72,81.38 66.6,76.5 70.64,76.5 v71.09,76.05
  Bottom 0.203: v61.72,92.28 61.72,93.04 SBRIO_MEZZANINE.228 | GYRO.2 61.77,87.81 v61.72,87.86 | v71.09,76.05 ACCEL.14
DIO1  (via drill 0.6)
  Top 0.254: v71.17,91.06 65.08,91.06 62.48,93.65 61.34,93.65 60.05,92.35 59.21,92.35 v57.3,90.45
  Bottom 0.254: 5525-3.3YM5-TR(3).P$3 C16.1 | C16.1 | C16.1 87.91,98.34 87.33,97.77 83.06,97.77 79.7,94.41 74.52,94.41 v71.17,91.06 | v57.3,90.45 57.3,91.16 SBRIO_MEZZANINE.216
DIO4  (1 unrouted)
DIO5
  Bottom 0.305: IC2.7 74.19,70.36 72.01,72.54 60.58,72.54 57.15,75.97 48.01,75.97 46.79,77.19 46.79,90.6 47.17,90.98 48.08,90.98 49.53,92.43 50.95,92.43 SBRIO_MEZZANINE.180
DIO6
  Bottom 0.254: 46.94,91.44 47.85,91.44
  Bottom 0.305: IC2.5 71.65,70.16 69.72,72.08 60.35,72.08 56.92,75.51 47.78,75.51 46.33,76.96 46.33,90.83 46.94,91.44 | 47.85,91.44 49.3,92.89 50.14,92.89 SBRIO_MEZZANINE.174
DIO7  (via drill 0.6)
  Top 0.254: v36.2,90.68 36.2,94.87 37.57,96.24 46.48,96.24 47.4,97.16 v47.4,100.97
  Bottom 0.254: 5525-3.3YM5-TR(2).P$3 56.27,45.65 C20.1 53.05,51.51 41.76,51.51 35.05,58.22 35.05,87.4 36.2,88.54 v36.2,90.68 | v47.4,100.97 47.4,100.58 47.62,100.36 47.62,98.3 47.93,97.99 48.69,97.99 48.92,97.77 48.92,94.49 48.28,93.85 SBRIO_MEZZANINE.162
DIO8
  Bottom 0.305: SBRIO_MEZZANINE.156 47.02,92.96 46.48,92.43 45.8,92.43 45.26,91.9 45.26,76.58 47.4,74.45 55.47,74.45 58.45,71.48 59.21,71.48 60.05,70.64 61.72,70.64 62.59,69.77 IC1.9
DIO9
  Bottom 0.254: 43.66,92.76 SBRIO_MEZZANINE.144
  Bottom 0.305: IC1.3 54.97,71.14 53.19,72.92 46.63,72.92 43.66,75.89 43.66,92.76
DIO10
  Bottom 0.254: 43.13,93.5 SBRIO_MEZZANINE.138
  Bottom 0.305: IC3.9 48.28,70.51 43.13,75.67 43.13,93.5
DIO11
  Bottom 0.305: IC3.3 SBRIO_MEZZANINE.126
DIO12  (via drill 0.6)
  Top 0.254: v82.6,41.07 81.84,41.83 81.84,46.33 80.62,47.55 58.9,47.55 51.44,55.02 v49.38,55.02 | U1.P$5 96.91,42.6 v95.71,42.6
  Bottom 0.254: v49.38,55.02 40.54,55.02 36.65,58.9 36.65,82.37 39.4,85.11 SBRIO_MEZZANINE.120 | v95.71,42.6 94.18,41.07 v82.6,41.07
DIO16  (via drill 0.6)
  Top 0.254: v67.21,96.77 68.81,96.77 v74.52,91.06
  Bottom 0.203: 65.53,96.77 64.67,96.77 SBRIO_MEZZANINE.231
  Bottom 0.254: v67.21,96.77 65.53,96.77 | v74.52,91.06 74.52,83.97 74.45,83.9
  Bottom 0.305: ACCEL.7 72.35,83.67 74.22,83.67 74.45,83.9 | 63.52,97.43 SBRIO_MEZZANINE.231
DIO17  (via drill 0.6)
  Top 0.203: v68.81,95.48 75.44,88.85 v75.44,81.31
  Bottom 0.203: ACCEL.9 v75.43,81.31 v75.44,81.31 | SBRIO_MEZZANINE.225 62.71,97.38 63.4,96.7 63.7,96.77 64.16,96.32 64.16,95.86 64.54,95.48 v68.81,95.48
DIO18  (via drill 0.6)
  Top 0.203: v59.51,91.14 60.81,89.84 60.81,81.31
  Top 0.305: 60.81,81.31 66.98,75.13 72.08,75.13 72.77,75.82 v72.77,76.28
  Bottom 0.203: 62.41,88.54 62.33,88.62 62.33,89.15 | 62.33,89.15 60.35,91.14 | 60.35,91.14 60.35,96.75 SBRIO_MEZZANINE.213 | GYRO.3 62.49,88.46 62.41,88.54 | 62.41,88.54 62.41,89.08 62.33,89.15 | 60.35,91.14 v59.51,91.14 | v72.77,76.28 72.39,76.65 ACCEL.13
DIO32
  Bottom 0.203: GYRO.5 64.71,91.5 62.94,93.27 62.94,93.8 62.56,94.18 61.65,94.18 SBRIO_MEZZANINE.221
DIO37
  Bottom 0.254: 51.36,91.97 52.73,93.34 52.73,94.21 SBRIO_MEZZANINE.179
  Bottom 0.305: IC2.9 76.73,70.71 74.45,73 60.81,73 57.38,76.43 48.23,76.43 47.24,77.42 47.24,89.46 49.76,91.97 51.36,91.97
DIO38
  Bottom 0.254: 48.92,93.27 48.92,93.8 49.55,94.44 SBRIO_MEZZANINE.167
  Bottom 0.305: IC2.3 69.11,70.56 68.05,71.63 60.12,71.63 56.69,75.06 47.55,75.06 45.8,76.81 45.8,91.75 45.95,91.9 47.55,91.9 48.92,93.27
DIO39  (via drill 0.6)
  Top 0.254: v34.59,90.45 34.59,94.03 37.34,96.77 45.57,96.77 46.1,97.31 v46.1,100.89
  Bottom 0.254: 5525-3.3YM5-TR(4).P$3 50.56,46.39 C17.1 50.56,50.18 49.76,50.98 41.6,50.98 34.52,58.06 34.52,90.37 v34.59,90.45 | v46.1,100.89 46.41,100.58 46.41,95.71 46.63,95.48 47.65,95.48 SBRIO_MEZZANINE.161
DIO40
  Bottom 0.254: 46.41,93.34 46.41,93.8 45.74,94.46 SBRIO_MEZZANINE.149
  Bottom 0.305: IC1.7 60.05,69.95 58.98,71.02 57.99,71.02 55.17,73.84 47.17,73.84 44.73,76.28 44.73,92.13 45.49,92.89 45.95,92.89 46.41,93.34
DIO41
  Bottom 0.305: IC1.5 57.51,70.73 54.86,73.38 46.94,73.38 44.2,76.12 44.2,92.35 45.11,93.27 45.11,94.11 44.48,94.74 SBRIO_MEZZANINE.143
DIO42
  Bottom 0.254: 42.6,73.61 42.6,94.18 SBRIO_MEZZANINE.131
  Bottom 0.305: IC3.7 45.74,70.46 42.6,73.61
DIO43
  Bottom 0.254: 41.3,94.21 SBRIO_MEZZANINE.125
  Bottom 0.305: IC3.5 43.2,70.18 41.3,72.08 41.3,94.21
DIO44  (via drill 0.6)
  Top 0.254: R16.1 84.76,44.02 80.77,48.01 60.66,48.01 v54.56,54.1
  Bottom 0.254: v54.56,54.1 40.62,54.1 36.12,58.6 36.12,82.6 38.79,85.27 38.79,94.18 SBRIO_MEZZANINE.113
DIO45  (via drill 0.6)
  Top 0.254: R15.1 84.88,48.46 61.95,48.46 v57.3,53.11
  Bottom 0.254: v57.3,53.11 40.84,53.11 35.59,58.37 35.59,82.91 37.49,84.81 37.49,94.21 SBRIO_MEZZANINE.107
DIO48  (via drill 0.6)
  Top 0.254: v68.12,97.69 69.42,97.69 v76.28,90.83
  Bottom 0.254: ACCEL.8 73.42,83.13 74.37,83.13 76.28,85.04 v76.28,90.83 | SBRIO_MEZZANINE.230 63.83,98.65 64.47,99.29 65.38,99.29 65.84,98.83 65.84,98.15 66.29,97.69 v68.12,97.69
DIO64
  Bottom 0.203: GYRO.6 65.36,91.99 64.16,93.19 64.16,93.95 63.93,94.18 63.25,94.18 62.94,94.49 62.94,95.1 62.26,95.78 SBRIO_MEZZANINE.226
DIO65
  Bottom 0.203: SBRIO_MEZZANINE.220 61.65,96.77 62.41,96.77 62.94,96.24 62.94,95.86 63.32,95.48 63.7,95.48 64.14,95.05 64.14,94.61 64.57,94.18 65,94.18 65.38,93.8 65.38,92.89 66.01,92.26 GYRO.7
DIO81  (via drill 0.6)
  Top 0.203: v62.79,90.3 72.92,80.16 v74.07,80.16
  Top 0.305: v77.57,90.83 68.89,99.52 v67.44,99.52
  Bottom 0.203: GYRO.4 62.79,89.96 v62.79,90.3 | v74.07,80.16 74.07,79.25 73.69,78.87 72.44,78.87 ACCEL.12
  Bottom 0.254: SBRIO_MEZZANINE.223 62.26,100.81 62.71,101.27 65.68,101.27 v67.44,99.52 | v77.57,90.83 77.57,81.76 75.97,80.16 v74.07,80.16
DIO83  (via drill 0.46)
  Top 0.254: LEVEL_SHIFTER.8 49.92,92.74 50.06,92.89 50.67,92.89 52.5,94.72
  Top 0.305: 52.5,94.72 58.29,94.72 58.45,94.87 v58.45,100.97
  Bottom 0.254: v58.45,100.97 SBRIO_MEZZANINE.205
DIO85  (via drill 0.6)
  Top 0.254: LEVEL_SHIFTER.5 51.22,98.54 51.89,99.21 53.11,99.21 53.42,99.52 53.42,101.5 53.65,101.73 55.78,101.73 v56.62,100.89
  Bottom 0.254: SBRIO_MEZZANINE.187 55.6,100.89 v56.62,100.89
DIO86  (via drill 0.6)
  Top 0.254: LEVEL_SHIFTER.4 51.87,98.35 52.27,98.75 53.49,98.75 54.03,99.29 54.03,100.66 v54.25,100.89
  Bottom 0.254: v54.25,100.89 54.25,100.81 SBRIO_MEZZANINE.181
DIO87  (via drill 0.6)
  Top 0.254: LEVEL_SHIFTER.3 52.52,97.32 52.05,96.85 49.76,96.85 49.23,97.38 49.23,99.44 v50.83,101.04
  Bottom 0.254: v50.83,101.04 SBRIO_MEZZANINE.169
DIO88  (via drill 0.6)
  Top 0.254: LEVEL_SHIFTER.2 53.17,97.29 52.27,96.39 49.53,96.39 48.77,97.16 v48.77,100.97
  Bottom 0.254: v48.77,100.97 48.77,100.71 SBRIO_MEZZANINE.163
  Bottom 0.406: 49.53,99.95 SBRIO_MEZZANINE.163
DIO90  (via drill 0.6)
  Top 0.254: v7.24,72.77 7.24,94.87 13.34,100.97 v43.74,100.97
  Bottom 0.254: v7.24,72.77 9.88,72.77 SBRIO_AUX.P$10 | v43.74,100.97 44.7,100.97 SBRIO_MEZZANINE.145
DIO91
  Bottom 0.254: SBRIO_MEZZANINE.133 41.63,101.5 13.26,101.5 6.78,95.02 6.78,76.2 8.23,74.75 9.89,74.75 SBRIO_AUX.P$8
DIO92
  Bottom 0.254: SBRIO_MEZZANINE.127 40.82,101.04 13.49,101.04 7.24,94.79 7.24,77.41 SBRIO_AUX.P$5
DIO93
  Bottom 0.254: SBRIO_MEZZANINE.115 38.73,100.58 13.72,100.58 7.7,94.56 7.7,78.95 SBRIO_AUX.P$3
DIO94
  Bottom 0.254: SBRIO_MEZZANINE.109 37.49,99.29 36.58,99.29 36.2,98.91 36.2,98.22 35.97,97.99 32.77,97.99 32.38,97.61 32.38,90.14 33.98,88.54 33.98,57.91 41.45,50.44 43.59,50.44 46.14,47.89 C19.1 5525-3.3YM5-TR(1).P$3
DIO95
  Bottom 0.254: 5225-3.3M5-TR(5).P$3 43.27,47.12 C18.1 | SBRIO_MEZZANINE.97 34.95,99.29 31.47,99.29 31.17,98.98 31.17,90.6 33.45,88.32 33.45,57.76 41.3,49.91 41.91,49.91 43.24,48.58 C18.1 | 43.13,48.4 C18.1
DIO_GND  (via drill 0.6)  (2 unrouted)
  Top 0.254: SBRIO_ANALOG.P$19 SBRIO_ANALOG.P$22 | SBRIO_ANALOG.P$26 SBRIO_ANALOG.P$25 SBRIO_ANALOG.P$27 SBRIO_ANALOG.P$29 SBRIO_ANALOG.P$31 SBRIO_ANALOG.P$33 SBRIO_ANALOG.P$35 SBRIO_ANALOG.P$37 SBRIO_ANALOG.P$39 SBRIO_ANALOG.P$41 SBRIO_ANALOG.P$43 SBRIO_ANALOG.P$45 SBRIO_ANALOG.P$47 SBRIO_ANALOG.P$49 | U$3.4 41.86,33.12 42.29,32.69 42.29,30.48 42.29,28.72 | 42.29,28.72 C11.2 42,26.77 C9.2 | 42.29,28.72 43.46,27.55 C12.1 43.36,28.87 43.36,33.3 43.97,33.91
  Top 0.305: v26.9,88.09 27.96,88.09 28.5,88.62 30.25,88.62 31.85,87.02 52.58,87.02 53.95,85.65 56.92,85.65 v58.98,83.59 | SBRIO_ANALOG.P$49 32.15,27.67 C10.2 41.1,27.67 C11.2
  Top 0.406: U$3.2 42.1,30.67 42.29,30.48
  Bottom 0.254: SBRIO_ANALOG.P$19 28.07,62.05 29.03,63.02 29.03,64.72 SBRIO_ANALOG.P$16 SBRIO_ANALOG.P$13 29.11,68.8 29.11,70.33 30.07,71.29 SBRIO_ANALOG.P$10 SBRIO_ANALOG.P$7 29.11,74.8 29.11,76.8 | SBRIO_ANALOG.P$22 29.11,58.8 29.11,56.72 SBRIO_ANALOG.P$26
  Bottom 0.305: 29.11,76.8 SBRIO_ANALOG.P$4 | SBRIO_ANALOG.P$1 SBRIO_ANALOG.P$4 | 69.76,78.94 62.64,78.94 61.86,79.72 C7.2 C8.2 59.72,83.62 v58.98,83.59 | 69.76,78.94 ACCEL.2 | 69.76,78.94 70.87,78.94 71.09,79.17 71.09,79.93 70.48,80.54 69.83,80.54 | 69.83,80.54 ACCEL.4 | 69.83,80.54 arc-90 69.8,80.58 ACCEL.5 | SBRIO_ANALOG.P$4 30.44,77.76 31.77,79.1 31.77,83.21 v26.9,88.09
E-STOP_OK  (1 unrouted)
  Bottom 0.254: R3.1 49.62,42.88 5525-3.3YM5-TR(4).P$1
GLV+
  Top 0.305: SBRIO_U1.S1 97.36,37.03 60.88,37.03 60.43,36.58
  Top 0.406: BSPD_U4.S1 61.72,21.57 61.72,30.48 59.89,32.31 58.6,32.31 57.53,33.38 57.53,35.74 58.37,36.58 60.43,36.58 66.37,30.63 AMS_U5.C-
  Bottom 0.305: F3.3 45.8,12.2 52.98,19.38 BSPD_U4.S1
  Bottom 0.406: F3.3 F3.4
GND  (via drill 0.6)  (2 unrouted)
  Top 0.254: LEVEL_SHIFTER.7 49.92,98.53 v52.35,100.97
  Bottom 0.203: C14.1 66,84.89 66.22,84.89 66.66,85.33 GYRO.13
  Bottom 0.254: 64.62,97.38 SBRIO_MEZZANINE.237 64.54,97.38 63.93,97.99 63.17,97.99 62.87,98.3 62.87,99.21 62.79,99.29 | R14.1 24.66,58.57 26.9,60.81 31.62,60.81 | v52.35,100.97 53.11,101.73 60.43,101.73 61.65,100.51 61.65,99.67 62.03,99.29 62.79,99.29 | 62.79,99.29 62.87,99.29 62.87,100.28 63.25,100.66 65.3,100.66 65.84,100.13 65.84,99.75 66.98,98.6 69.04,98.6 70.33,97.31 70.33,92.58 | GYRO.8 67.94,90.19 | R18.1 26.3,54.79 30.94,54.79
  Bottom 0.305: 67.94,90.19 70.33,92.58
  other vias: 116.2,40.16 115.82,45.49 79.17,56.92 71.17,85.12 32.38,66.04 32.38,67.31 32.38,64.77 39.37,67.31 39.37,66.04 39.37,64.77 43.81,67.31 43.81,66.04 43.81,64.77 54.61,67.31 54.61,66.04 54.61,64.77 61.59,67.31 61.59,66.04 61.59,64.77 69.85,67.31 69.85,66.04 69.85,64.77 77.65,78.11 79.25,79.55 115.52,83.13 115.52,81.84 120.17,40.77
  pour Top (rank 6): 0,0 137.82,0 137.82,102.87 0,102.87
  pour Bottom (rank 6): 0,0 137.82,0 137.82,102.87 0,102.87
IMD_OK+
  Top 0.406: SAFETY_CONN.5 74.02,9.38 SAFETY_CONN.6 74.02,16.18 75.29,17.45 75.29,22.28 IMD_U6.C+
IMD_OK_IN
  Bottom 0.254: 5225-3.3M5-TR(5).P$1 41.74,43.13 R2.1
  Bottom 0.305: ACCUMULATOR_CONN.8 115.09,15.37 109.8,20.65 109.8,37.8 103.94,43.66 83.44,43.66 77.95,38.18 45.12,38.18 R2.1
IMD_OUT
  Bottom 0.406: IC3.14 45.74,58.04 46.71,57.07 59.13,57.07 61.11,55.09 61.11,43.43 64.16,40.39 77.04,40.39 82.53,45.87 102.18,45.87 114,57.68 TUB_CONN.5
INTER_OK+
  Top 0.406: SAFETY_CONN.7 79.02,9.38 SAFETY_CONN.8 82.98,15.85 86.64,15.85 88.09,17.3 88.09,22.38 INTERLOCKS_U3.C+
LAP_TIMER_IN  (via drill 0.6)
  Top 0.254: U1.P$8 94.9,40.35 R36.2
  Top 0.305: v114.83,49.38 116.36,50.9 116.36,54.71 120.62,58.98 122.15,58.98 122.61,59.44 122.61,61.37 TUB_CONN.2 | U1.P$8 98.13,40.35 100.15,42.37 107.44,42.37 v107.82,42.75
  Bottom 0.305: v107.82,42.75 108.2,42.75 v114.83,49.38
LATCH_LED+  (1 unrouted)
  Top 0.406: LATCH_CONN.6 102.19,9.38 LATCH_CONN.5
LATCH_OK  (1 unrouted)
  Bottom 0.254: R5.1 55.35,41.37 5525-3.3YM5-TR(2).P$1
LATCH_SW_IN  (1 unrouted)
  Top 0.406: LATCH_CONN.2 92.19,9.38 LATCH_CONN.1
  Bottom 0.305: LATCH_U7.NO_2 88.5,76.22 U$1.P$1 88.5,58.64 LATCH_U7.COIL_2
LATCH_SW_OUT  (1 unrouted)
  Top 0.406: LATCH_CONN.3 97.19,9.38 LATCH_CONN.4 94.14,14.94 91.59,14.94 89,17.53 89,23.93 85.65,27.28 83.44,27.28 80.47,30.25 77.47,30.25 IMD_U6.S2
N$2
  Top 0.406: SBRIO_U2.S1 SBRIO_U1.S2
N$3
  Top 0.305: F15.2 120.13,80.54 AIO_PO_CONN.9
N$4  (via drill 0.6)
  Top 0.305: 31.01,83.36 50.8,83.36 arc-45 50.98,83.29 54.1,80.16 56.66,80.16 arc-45 56.84,80.09 65.3,71.63 73.89,71.63 arc45 74.06,71.7 75.44,73.08 arc-45 75.62,73.15 v76.66,73.15
  Top 0.406: SBRIO_ANALOG.P$2 30.07,82.31 arc-45 30.14,82.49 31.01,83.36
  Bottom 0.406: 5238B-7-F.P$2 76.4,56.15 R13.2 arc45 76.5,56.09 76.5,56.92 77.5,57.91 arc-45 77.68,57.99 79.1,57.99 79.1,70.61 arc45 79.02,70.79 v76.66,73.15
N$6
  Top 0.305: F20.2 120.18,79.25 122.71,79.25 AIO_PO_CONN.10
N$7
  Top 0.406: INTERLOCKS_U3.S1 81.53,19.43 75.74,25.22 75.74,30.25 74.22,31.77 72.47,31.77 70.1,34.14 70.1,35.74 70.87,36.5 91.08,36.5 SBRIO_U2.S2
N$8
  Top 0.406: AMS_U5.S1 64.31,21.44 64.31,30.4 60.1,34.62 BSPD_U4.S2
N$9
  Top 0.305: F21.2 120.33,78 AIO_PO_CONN.11
N$10
  Top 0.305: F22.2 120.46,76.73 122.73,76.73 AIO_PO_CONN.12
N$13
  Top 0.406: AMS_U5.S2 66.37,32.92 69.27,30.02 69.27,24 73.1,20.17 IMD_U6.S1
N$14
  Top 0.406: F3.1 F3.2 19.62,20.72 U$8.A
N$20
  Top 0.305: F16.2 110.96,85.2 111.4,85.65 117.42,85.65 119.33,87.55 119.33,88.32 120.4,89.38 122.68,89.38 AIO_PO_CONN.2
N$37  (via drill 0.6)
  Top 0.203: v65.99,88.24 68.05,86.18 v68.89,86.18
  Bottom 0.203: GYRO.14 v65.99,88.24
  Bottom 0.254: C13.2 70.36,87.66 v68.89,86.18 66.92,84.21 C14.2
N$38
  Bottom 0.406: R35.2 C13.1
N$41
  Top 0.406: F6.1 79.41,88.02 BSPD_CONN.10 81.64,92.75 BSPD_CONN.9
N$54
  Top 0.406: 4403-7-F.P$2 91.45,44.76 R11.2
N$56
  Top 0.406: 4403-7-F.P$1 95.58,44.13 F17.2
N$57
  Top 0.406: F18.2 97.54,50.15 4403-7-F(2).P$1
N$58
  Top 0.406: R12.2 91.19,48.15 4403-7-F(2).P$2
N$60
  Top 0.406: R15.2 85.85,46.29 4401-7-F(1).P$2
N$61
  Top 0.406: R12.1 89.04,46.53 4401-7-F(1).P$1
N$62
  Top 0.406: 4401-7-F(2).P$2 86.86,42.43 R16.2
N$63
  Top 0.406: 4401-7-F(2).P$1 90.16,40.18 R11.1
PO2
  Bottom 0.406: IC1.17 56.13,59.24 56.46,58.9 59.82,58.9 62.94,55.78 62.94,44.12 64.85,42.22 76.35,42.22 81.84,47.7 101.5,47.7 113.08,59.28 113.08,67.13 118.87,72.92 AIO_PO_CONN.15
PO3
  Bottom 0.406: IC1.14 59.94,59.62 63.55,56.01 63.55,44.35 65.08,42.82 76.12,42.82 81.61,48.31 101.27,48.31 112.47,59.51 112.47,67.59 119.1,74.22 122.76,74.22 AIO_PO_CONN.14
PO4
  Bottom 0.406: IC1.13 61.21,59.19 64.16,56.24 64.16,44.65 65.38,43.43 75.82,43.43 81.31,48.92 100.97,48.92 111.78,59.74 111.78,67.74 119.51,75.46 AIO_PO_CONN.13
PRECHARGE_DONE+
  Top 0.406: TSMS_CONN.4 56.17,9.31 TSMS_CONN.3
  Bottom 0.406: TSMS_CONN.4 58.86,11.81 F1.1
SBRIO_OK+_1  (1 unrouted)
SBRIO_OK+_1_RELAY_IN
  Top 0.406: SBRIO_U1.C+ 101.04,30.81 F2.2
SBRIO_OK_2_RELAY
  Top 0.305: SBRIO_U2.C+ 95.56,27.05 103.7,27.05 F14.2
SHIELD  (1 unrouted)
  Top 0.305: ACCUMULATOR_CONN.6 118.31,12.83 113.46,17.68 113.46,21.36 SBRIO_CAN.P$10
SHUTDOWN_OK+  (1 unrouted)
STEERING_POS
  Top 0.254: TUB_CONN.16 121.31,42.29 116.01,42.29 R17.2
  Top 0.305: 31.39,59.36 30.79,58.75 29.07,58.75 SBRIO_ANALOG.P$21
  Top 0.406: R17.2 113.12,40.66 110.03,43.74 110.03,55.47 102.95,62.56 32.99,62.56 31.39,60.96 31.39,59.36
  Bottom 0.305: SBRIO_AUX.P$39 9.88,42.75 11.66,42.75 13.72,44.81 13.72,53.72 17.6,57.61 25.92,57.61 SBRIO_ANALOG.P$21
THROTTLE_IN_1
  Top 0.254: TUB_CONN.13 115.4,47.52 R20.2
  Top 0.406: R20.2 113.94,47.9 111.25,50.6 111.25,55.93 103.43,63.76 SBRIO_ANALOG.P$18
THROTTLE_IN_2
  Top 0.254: TUB_CONN.14 122.73,46.25 120.62,46.25 119.14,44.77 R21.2
  Top 0.406: R21.2 116.58,43.51 112.7,43.51 110.64,45.57 110.64,55.7 103.17,63.17 31.48,63.17 SBRIO_ANALOG.P$20
THROTTLE_OK_OUT  (via drill 0.6)
  Top 0.305: F6.2 80.62,84.47 v80.62,80.39
  Bottom 0.254: 80.54,56.53 80.24,56.23
  Bottom 0.305: IC2.18 69.11,55.17 69.5,54.78 78.79,54.78 80.24,56.23 80.62,56.61 v80.62,80.39
TSMS_IN+
  Top 0.406: TSMS_CONN.2 51.17,9.31 TSMS_CONN.1
TSMS_OUT+
  Top 0.406: SAFETY_CONN.10 84.02,9.38 SAFETY_CONN.9
  Bottom 0.406: SAFETY_CONN.9 77.17,2.54 U$8.CENTER
TSMS_OUT_CTRL+  (1 unrouted)
  Bottom 0.305: U$2.P$1 LATCH_U7.CENTER_1
WS1
  Top 0.254: LEVEL_SHIFTER.13 53.17,92.49 53.49,92.81 59.36,92.81 66.88,100.33 68.75,100.33 75.36,93.73
  Top 0.305: 75.36,93.73 80.01,93.73 83.36,97.08 104.93,97.08 105.84,96.16 105.84,87.48 107.06,86.26 117.12,86.26 118.11,87.25 U$4.1
  Bottom 0.406: 118.11,90.2 U$4.1
WS2
  Top 0.254: LEVEL_SHIFTER.12 52.52,92.52 53.26,93.27 59.13,93.27 66.65,100.79 68.98,100.79 75.59,94.18
  Top 0.305: 75.59,94.18 79.78,94.18 83.13,97.54 105.16,97.54 106.3,96.39 106.3,87.71 107.29,86.72 114.3,86.72 115.57,87.99 U$4.2
WS3
  Top 0.254: LEVEL_SHIFTER.11 51.87,92.56 53.03,93.73 58.9,93.73 66.42,101.24 69.22,101.24 75.74,94.72 | 113,90.14 U$4.3
  Top 0.305: 75.74,94.72 79.63,94.72 82.91,97.99 105.39,97.99 106.76,96.62 106.76,87.94 107.52,87.17 112.32,87.17 113,87.86 113,90.14
WS4
  Top 0.254: LEVEL_SHIFTER.10 51.22,92.75 52.73,94.26 58.6,94.26 66.03,101.7 69.45,101.7 75.89,95.25
  Top 0.305: 75.89,95.25 79.4,95.25 82.68,98.53 105.54,98.53 107.29,96.77 107.29,88.09 107.67,87.71 109.65,87.71 110.49,88.54 U$4.4